# Altium PCB SCMLI_Snipped.PcbDoc (part 4 of 5)
Units mil, origin at the board's own origin, x right, y up, seen from the top; angles counter-clockwise.
Board outline 12129 x 3278 mil, 4 copper layers (Top Layer, GNDPlane, PowRet, Bottom Layer), stack 25.6 mil thick; 452 components, 391 nets, 1786 pads, 827 vias.
Unrouted connection lines stored in the file: 1.
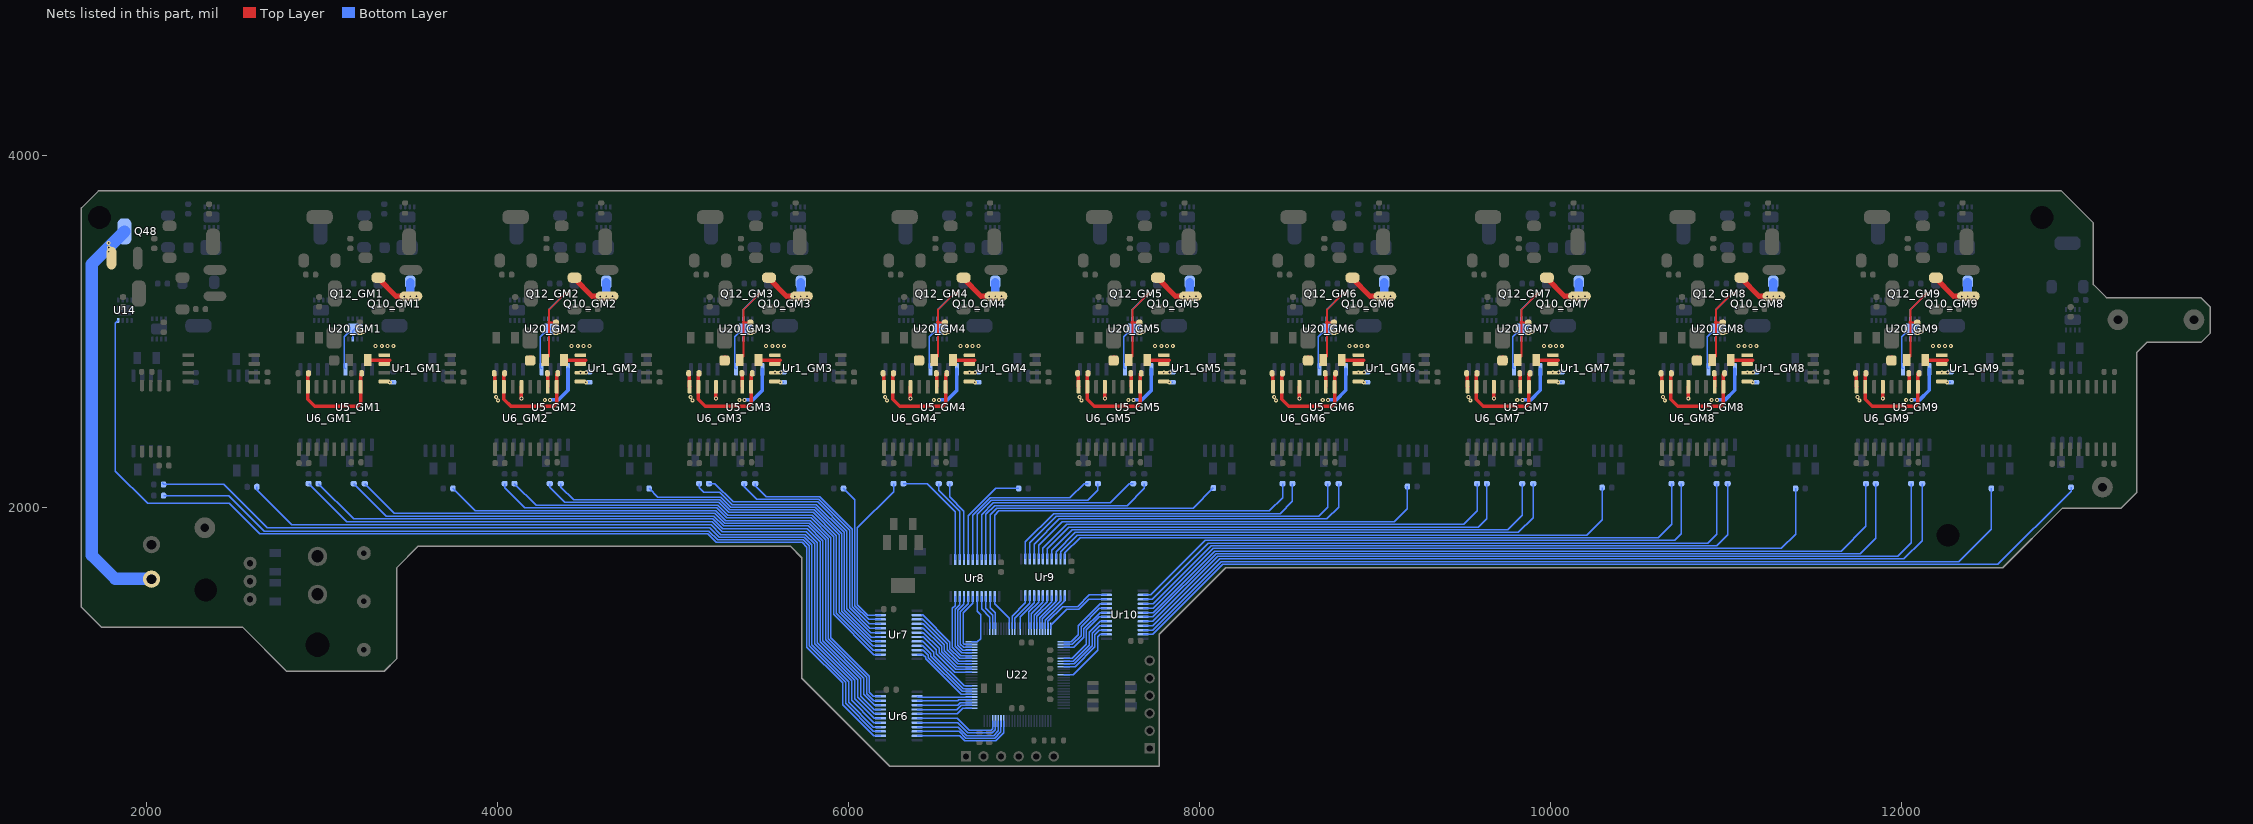
[diagram p6: the nets of this part, all layers, seen from the top]

## Via types
v1: diameter 23, hole 10, Top Layer to Bottom Layer, 827 vias

## Nets (pads, with @x,y where several pads share a name; then routed paths per layer and width w, separated by ;. In a path a pad name is that pad's centre, name@x,y a point inside that pad or via, vN(x,y) a via of type N, cw(c..) or ccw(c..) an arc to the next point about the centre after c; other vN are vias at no path point) (continued)
REFC_5V_GM2: C9_GM2.2 C17_GM2.2 Cr1_1_GM2.2 Cu5_2_GM2.2 Cu20_1_GM2.2 D6_GM2.1 U5_GM2.8 U6_GM2.10 U6_GM2.13 U6_GM2.16 U20_GM2.6 Ur1_GM2.3 | length 1131.9
  Top Layer w10: Cu5_2_GM2.2@4272.85,2837 4294,2858.15 4294,3052 4294,3125 4382,3213 v1(4395,3213) ; 4294.44,3051.56 Cu20_1_GM2.2@4333,3051.56
  Top Layer w20: C17_GM2.2@3985.4,2762 3985.4,2686.6 U6_GM2.16@3987,2685 ; v1(4137,2618.05) U6_GM2.13@4137,2685 ; C9_GM2.2@4284.47,2762 4287,2759.47 U6_GM2.10@4287,2685 ; 4294,3052 4294.44,3051.56
  Top Layer w50: D6_GM2.1@4186,2835 D6_GM2.1@4188,2837
  Bottom Layer w8: U20_GM2.6@4293.2,3073.07 4293.2,3124.2 4382,3213 v1(4395,3213)
  Bottom Layer w20: v1(4300,2610) 4346,2610 4402,2666 U5_GM2.8@4402,2784.13
  other v1: 4003,2608 4270,2610 3993,2627 4472.81,2765.28 4505,2766
REFC_5V_GM3: C9_GM3.2 C17_GM3.2 Cr1_1_GM3.2 Cu5_2_GM3.2 Cu20_1_GM3.2 D6_GM3.1 U5_GM3.8 U6_GM3.10 U6_GM3.13 U6_GM3.16 U20_GM3.6 Ur1_GM3.3 | length 1131.9
  Top Layer w10: Cu5_2_GM3.2@5380.85,2837 5402,2858.15 5402,3052 5402,3125 5490,3213 v1(5503,3213) ; 5402.44,3051.56 Cu20_1_GM3.2@5441,3051.56
  Top Layer w20: C17_GM3.2@5093.4,2762 5093.4,2686.6 U6_GM3.16@5095,2685 ; v1(5245,2618.05) U6_GM3.13@5245,2685 ; C9_GM3.2@5392.47,2762 5395,2759.47 U6_GM3.10@5395,2685 ; 5402,3052 5402.44,3051.56
  Top Layer w50: D6_GM3.1@5294,2835 D6_GM3.1@5296,2837
  Bottom Layer w8: U20_GM3.6@5401.2,3073.07 5401.2,3124.2 5490,3213 v1(5503,3213)
  Bottom Layer w20: v1(5408,2610) 5454,2610 5510,2666 U5_GM3.8@5510,2784.13
  other v1: 5111,2608 5378,2610 5101,2627 5580.81,2765.28 5613,2766
REFC_5V_GM4: C9_GM4.2 C17_GM4.2 Cr1_1_GM4.2 Cu5_2_GM4.2 Cu20_1_GM4.2 D6_GM4.1 U5_GM4.8 U6_GM4.10 U6_GM4.13 U6_GM4.16 U20_GM4.6 Ur1_GM4.3 | length 1131.9
  Top Layer w10: Cu5_2_GM4.2@6488.85,2837 6510,2858.15 6510,3052 6510,3125 6598,3213 v1(6611,3213) ; 6510.44,3051.56 Cu20_1_GM4.2@6549,3051.56
  Top Layer w20: C17_GM4.2@6201.4,2762 6201.4,2686.6 U6_GM4.16@6203,2685 ; v1(6353,2618.05) U6_GM4.13@6353,2685 ; C9_GM4.2@6500.47,2762 6503,2759.47 U6_GM4.10@6503,2685 ; 6510,3052 6510.44,3051.56
  Top Layer w50: D6_GM4.1@6402,2835 D6_GM4.1@6404,2837
  Bottom Layer w8: U20_GM4.6@6509.2,3073.07 6509.2,3124.2 6598,3213 v1(6611,3213)
  Bottom Layer w20: v1(6516,2610) 6562,2610 6618,2666 U5_GM4.8@6618,2784.13
  other v1: 6219,2608 6486,2610 6209,2627 6688.81,2765.28 6721,2766
REFC_5V_GM5: C9_GM5.2 C17_GM5.2 Cr1_1_GM5.2 Cu5_2_GM5.2 Cu20_1_GM5.2 D6_GM5.1 U5_GM5.8 U6_GM5.10 U6_GM5.13 U6_GM5.16 U20_GM5.6 Ur1_GM5.3 | length 1131.9
  Top Layer w10: Cu5_2_GM5.2@7596.85,2837 7618,2858.15 7618,3052 7618,3125 7706,3213 v1(7719,3213) ; 7618.44,3051.56 Cu20_1_GM5.2@7657,3051.56
  Top Layer w20: C17_GM5.2@7309.4,2762 7309.4,2686.6 U6_GM5.16@7311,2685 ; v1(7461,2618.05) U6_GM5.13@7461,2685 ; C9_GM5.2@7608.47,2762 7611,2759.47 U6_GM5.10@7611,2685 ; 7618,3052 7618.44,3051.56
  Top Layer w50: D6_GM5.1@7510,2835 D6_GM5.1@7512,2837
  Bottom Layer w8: U20_GM5.6@7617.2,3073.07 7617.2,3124.2 7706,3213 v1(7719,3213)
  Bottom Layer w20: v1(7624,2610) 7670,2610 7726,2666 U5_GM5.8@7726,2784.13
  other v1: 7327,2608 7594,2610 7317,2627 7796.81,2765.28 7829,2766
REFC_5V_GM6: C9_GM6.2 C17_GM6.2 Cr1_1_GM6.2 Cu5_2_GM6.2 Cu20_1_GM6.2 D6_GM6.1 U5_GM6.8 U6_GM6.10 U6_GM6.13 U6_GM6.16 U20_GM6.6 Ur1_GM6.3 | length 1131.9
  Top Layer w10: Cu5_2_GM6.2@8704.85,2837 8726,2858.15 8726,3052 8726,3125 8814,3213 v1(8827,3213) ; 8726.44,3051.56 Cu20_1_GM6.2@8765,3051.56
  Top Layer w20: C17_GM6.2@8417.4,2762 8417.4,2686.6 U6_GM6.16@8419,2685 ; v1(8569,2618.05) U6_GM6.13@8569,2685 ; C9_GM6.2@8716.47,2762 8719,2759.47 U6_GM6.10@8719,2685 ; 8726,3052 8726.44,3051.56
  Top Layer w50: D6_GM6.1@8618,2835 D6_GM6.1@8620,2837
  Bottom Layer w8: U20_GM6.6@8725.2,3073.07 8725.2,3124.2 8814,3213 v1(8827,3213)
  Bottom Layer w20: v1(8732,2610) 8778,2610 8834,2666 U5_GM6.8@8834,2784.13
  other v1: 8435,2608 8702,2610 8425,2627 8904.81,2765.28 8937,2766
REFC_5V_GM7: C9_GM7.2 C17_GM7.2 Cr1_1_GM7.2 Cu5_2_GM7.2 Cu20_1_GM7.2 D6_GM7.1 U5_GM7.8 U6_GM7.10 U6_GM7.13 U6_GM7.16 U20_GM7.6 Ur1_GM7.3 | length 1131.9
  Top Layer w10: Cu5_2_GM7.2@9812.85,2837 9834,2858.15 9834,3052 9834,3125 9922,3213 v1(9935,3213) ; 9834.44,3051.56 Cu20_1_GM7.2@9873,3051.56
  Top Layer w20: C17_GM7.2@9525.4,2762 9525.4,2686.6 U6_GM7.16@9527,2685 ; v1(9677,2618.05) U6_GM7.13@9677,2685 ; C9_GM7.2@9824.47,2762 9827,2759.47 U6_GM7.10@9827,2685 ; 9834,3052 9834.44,3051.56
  Top Layer w50: D6_GM7.1@9726,2835 D6_GM7.1@9728,2837
  Bottom Layer w8: U20_GM7.6@9833.2,3073.07 9833.2,3124.2 9922,3213 v1(9935,3213)
  Bottom Layer w20: v1(9840,2610) 9886,2610 9942,2666 U5_GM7.8@9942,2784.13
  other v1: 9543,2608 9810,2610 9533,2627 10012.81,2765.28 10045,2766
REFC_5V_GM8: C9_GM8.2 C17_GM8.2 Cr1_1_GM8.2 Cu5_2_GM8.2 Cu20_1_GM8.2 D6_GM8.1 U5_GM8.8 U6_GM8.10 U6_GM8.13 U6_GM8.16 U20_GM8.6 Ur1_GM8.3 | length 1131.9
  Top Layer w10: Cu5_2_GM8.2@10920.85,2837 10942,2858.15 10942,3052 10942,3125 11030,3213 v1(11043,3213) ; 10942.44,3051.56 Cu20_1_GM8.2@10981,3051.56
  Top Layer w20: C17_GM8.2@10633.4,2762 10633.4,2686.6 U6_GM8.16@10635,2685 ; v1(10785,2618.05) U6_GM8.13@10785,2685 ; C9_GM8.2@10932.47,2762 10935,2759.47 U6_GM8.10@10935,2685 ; 10942,3052 10942.44,3051.56
  Top Layer w50: D6_GM8.1@10834,2835 D6_GM8.1@10836,2837
  Bottom Layer w8: U20_GM8.6@10941.2,3073.07 10941.2,3124.2 11030,3213 v1(11043,3213)
  Bottom Layer w20: v1(10948,2610) 10994,2610 11050,2666 U5_GM8.8@11050,2784.13
  other v1: 10651,2608 10918,2610 10641,2627 11120.81,2765.28 11153,2766
REFC_5V_GM9: C9_GM9.2 C17_GM9.2 Cr1_1_GM9.2 Cu5_2_GM9.2 Cu20_1_GM9.2 D6_GM9.1 U5_GM9.8 U6_GM9.10 U6_GM9.13 U6_GM9.16 U20_GM9.6 Ur1_GM9.3 | length 1131.9
  Top Layer w10: Cu5_2_GM9.2@12028.85,2837 12050,2858.15 12050,3052 12050,3125 12138,3213 v1(12151,3213) ; 12050.44,3051.56 Cu20_1_GM9.2@12089,3051.56
  Top Layer w20: C17_GM9.2@11741.4,2762 11741.4,2686.6 U6_GM9.16@11743,2685 ; v1(11893,2618.05) U6_GM9.13@11893,2685 ; C9_GM9.2@12040.47,2762 12043,2759.47 U6_GM9.10@12043,2685 ; 12050,3052 12050.44,3051.56
  Top Layer w50: D6_GM9.1@11942,2835 D6_GM9.1@11944,2837
  Bottom Layer w8: U20_GM9.6@12049.2,3073.07 12049.2,3124.2 12138,3213 v1(12151,3213)
  Bottom Layer w20: v1(12056,2610) 12102,2610 12158,2666 U5_GM9.8@12158,2784.13
  other v1: 11759,2608 12026,2610 11749,2627 12228.81,2765.28 12261,2766
REFC_GM1: C8_GM1.1 C9_GM1.1 C17_GM1.1 Cr1_1_GM1.1 Cu5_2_GM1.1 Cu20_1_GM1.1 Q10_GM1.3 Q12_GM1.3 U5_GM1.5 U6_GM1.9 U6_GM1.15 U20_GM1.3 Ur1_GM1.1 Ur1_GM1.2 Ur1_GM1.4 | length 1362
  Top Layer w20: C17_GM1.1@2926.53,2762 2920,2755.47 U6_GM1.15@2920,2685 2920,2615 2960,2575 3203,2575 3220,2592 U6_GM1.9@3220,2685 3220,2755.47 C9_GM1.1@3226.53,2762 ; Cu5_2_GM1.1@3262.15,2837 3386.18,2837
  Top Layer w30: Q12_GM1.3@3322.29,3301.46 3422.62,3201.13 C8_GM1.1@3482.29,3201.13
  Bottom Layer w8: U5_GM1.5@3135,2787 3128,2794 3128,2971 U20_GM1.3@3153,2996 ; U20_GM1.3@3176.2,2956.93 3176.2,3002.2 U20_GM1.3@3189,3015 ; v1@3385,2709 v1(3386.47,2710.47) Cr1_1_GM1.1@3407,2710.47
  Bottom Layer w10: v1@3385,2709 cw(c3386.47,2709) v1(3386.47,2710.47)
  Bottom Layer w50: v1(3503,3201.2) Q10_GM1.3@3503,3281.02
  other v1: 3374,2917 3407,2917.28 3305,2917.56 3341,2918 3217,2992 3238,2996 3469,3200.17 3539,3201.2
REFC_GM2: C8_GM2.1 C9_GM2.1 C17_GM2.1 Cr1_1_GM2.1 Cu5_2_GM2.1 Cu20_1_GM2.1 Q10_GM2.3 Q12_GM2.3 U5_GM2.5 U6_GM2.9 U6_GM2.15 U20_GM2.3 Ur1_GM2.1 Ur1_GM2.2 Ur1_GM2.4 | length 1362
  Top Layer w20: C17_GM2.1@4043.53,2762 4037,2755.47 U6_GM2.15@4037,2685 4037,2615 4077,2575 4320,2575 4337,2592 U6_GM2.9@4337,2685 4337,2755.47 C9_GM2.1@4343.53,2762 ; Cu5_2_GM2.1@4379.15,2837 4503.18,2837
  Top Layer w30: Q12_GM2.3@4439.29,3301.46 4539.62,3201.13 C8_GM2.1@4599.29,3201.13
  Bottom Layer w8: U5_GM2.5@4252,2787 4245,2794 4245,2971 U20_GM2.3@4270,2996 ; U20_GM2.3@4293.2,2956.93 4293.2,3002.2 U20_GM2.3@4306,3015 ; v1@4502,2709 v1(4503.47,2710.47) Cr1_1_GM2.1@4524,2710.47
  Bottom Layer w10: v1@4502,2709 cw(c4503.47,2709) v1(4503.47,2710.47)
  Bottom Layer w50: v1(4620,3201.2) Q10_GM2.3@4620,3281.02
  other v1: 4491,2917 4524,2917.28 4422,2917.56 4458,2918 4334,2992 4355,2996 4586,3200.17 4656,3201.2
REFC_GM3: C8_GM3.1 C9_GM3.1 C17_GM3.1 Cr1_1_GM3.1 Cu5_2_GM3.1 Cu20_1_GM3.1 Q10_GM3.3 Q12_GM3.3 U5_GM3.5 U6_GM3.9 U6_GM3.15 U20_GM3.3 Ur1_GM3.1 Ur1_GM3.2 Ur1_GM3.4 | length 1362
  Top Layer w20: C17_GM3.1@5151.53,2762 5145,2755.47 U6_GM3.15@5145,2685 5145,2615 5185,2575 5428,2575 5445,2592 U6_GM3.9@5445,2685 5445,2755.47 C9_GM3.1@5451.53,2762 ; Cu5_2_GM3.1@5487.15,2837 5611.18,2837
  Top Layer w30: Q12_GM3.3@5547.29,3301.46 5647.62,3201.13 C8_GM3.1@5707.29,3201.13
  Bottom Layer w8: U5_GM3.5@5360,2787 5353,2794 5353,2971 U20_GM3.3@5378,2996 ; U20_GM3.3@5401.2,2956.93 5401.2,3002.2 U20_GM3.3@5414,3015 ; v1@5610,2709 v1(5611.47,2710.47) Cr1_1_GM3.1@5632,2710.47
  Bottom Layer w10: v1@5610,2709 cw(c5611.47,2709) v1(5611.47,2710.47)
  Bottom Layer w50: v1(5728,3201.2) Q10_GM3.3@5728,3281.02
  other v1: 5599,2917 5632,2917.28 5530,2917.56 5566,2918 5442,2992 5463,2996 5694,3200.17 5764,3201.2
REFC_GM4: C8_GM4.1 C9_GM4.1 C17_GM4.1 Cr1_1_GM4.1 Cu5_2_GM4.1 Cu20_1_GM4.1 Q10_GM4.3 Q12_GM4.3 U5_GM4.5 U6_GM4.9 U6_GM4.15 U20_GM4.3 Ur1_GM4.1 Ur1_GM4.2 Ur1_GM4.4 | length 1362
  Top Layer w20: C17_GM4.1@6259.53,2762 6253,2755.47 U6_GM4.15@6253,2685 6253,2615 6293,2575 6536,2575 6553,2592 U6_GM4.9@6553,2685 6553,2755.47 C9_GM4.1@6559.53,2762 ; Cu5_2_GM4.1@6595.15,2837 6719.18,2837
  Top Layer w30: Q12_GM4.3@6655.29,3301.46 6755.62,3201.13 C8_GM4.1@6815.29,3201.13
  Bottom Layer w8: U5_GM4.5@6468,2787 6461,2794 6461,2971 U20_GM4.3@6486,2996 ; U20_GM4.3@6509.2,2956.93 6509.2,3002.2 U20_GM4.3@6522,3015 ; v1@6718,2709 v1(6719.47,2710.47) Cr1_1_GM4.1@6740,2710.47
  Bottom Layer w10: v1@6718,2709 cw(c6719.47,2709) v1(6719.47,2710.47)
  Bottom Layer w50: v1(6836,3201.2) Q10_GM4.3@6836,3281.02
  other v1: 6707,2917 6740,2917.28 6638,2917.56 6674,2918 6550,2992 6571,2996 6802,3200.17 6872,3201.2
REFC_GM5: C8_GM5.1 C9_GM5.1 C17_GM5.1 Cr1_1_GM5.1 Cu5_2_GM5.1 Cu20_1_GM5.1 Q10_GM5.3 Q12_GM5.3 U5_GM5.5 U6_GM5.9 U6_GM5.15 U20_GM5.3 Ur1_GM5.1 Ur1_GM5.2 Ur1_GM5.4 | length 1362
  Top Layer w20: C17_GM5.1@7367.53,2762 7361,2755.47 U6_GM5.15@7361,2685 7361,2615 7401,2575 7644,2575 7661,2592 U6_GM5.9@7661,2685 7661,2755.47 C9_GM5.1@7667.53,2762 ; Cu5_2_GM5.1@7703.15,2837 7827.18,2837
  Top Layer w30: Q12_GM5.3@7763.29,3301.46 7863.62,3201.13 C8_GM5.1@7923.29,3201.13
  Bottom Layer w8: U5_GM5.5@7576,2787 7569,2794 7569,2971 U20_GM5.3@7594,2996 ; U20_GM5.3@7617.2,2956.93 7617.2,3002.2 U20_GM5.3@7630,3015 ; v1@7826,2709 v1(7827.47,2710.47) Cr1_1_GM5.1@7848,2710.47
  Bottom Layer w10: v1@7826,2709 cw(c7827.47,2709) v1(7827.47,2710.47)
  Bottom Layer w50: v1(7944,3201.2) Q10_GM5.3@7944,3281.02
  other v1: 7815,2917 7848,2917.28 7746,2917.56 7782,2918 7658,2992 7679,2996 7910,3200.17 7980,3201.2
REFC_GM6: C8_GM6.1 C9_GM6.1 C17_GM6.1 Cr1_1_GM6.1 Cu5_2_GM6.1 Cu20_1_GM6.1 Q10_GM6.3 Q12_GM6.3 U5_GM6.5 U6_GM6.9 U6_GM6.15 U20_GM6.3 Ur1_GM6.1 Ur1_GM6.2 Ur1_GM6.4 | length 1362
  Top Layer w20: C17_GM6.1@8475.53,2762 8469,2755.47 U6_GM6.15@8469,2685 8469,2615 8509,2575 8752,2575 8769,2592 U6_GM6.9@8769,2685 8769,2755.47 C9_GM6.1@8775.53,2762 ; Cu5_2_GM6.1@8811.15,2837 8935.18,2837
  Top Layer w30: Q12_GM6.3@8871.29,3301.46 8971.62,3201.13 C8_GM6.1@9031.29,3201.13
  Bottom Layer w8: U5_GM6.5@8684,2787 8677,2794 8677,2971 U20_GM6.3@8702,2996 ; U20_GM6.3@8725.2,2956.93 8725.2,3002.2 U20_GM6.3@8738,3015 ; v1@8934,2709 v1(8935.47,2710.47) Cr1_1_GM6.1@8956,2710.47
  Bottom Layer w10: v1@8934,2709 cw(c8935.47,2709) v1(8935.47,2710.47)
  Bottom Layer w50: v1(9052,3201.2) Q10_GM6.3@9052,3281.02
  other v1: 8923,2917 8956,2917.28 8854,2917.56 8890,2918 8766,2992 8787,2996 9018,3200.17 9088,3201.2
REFC_GM7: C8_GM7.1 C9_GM7.1 C17_GM7.1 Cr1_1_GM7.1 Cu5_2_GM7.1 Cu20_1_GM7.1 Q10_GM7.3 Q12_GM7.3 U5_GM7.5 U6_GM7.9 U6_GM7.15 U20_GM7.3 Ur1_GM7.1 Ur1_GM7.2 Ur1_GM7.4 | length 1362
  Top Layer w20: C17_GM7.1@9583.53,2762 9577,2755.47 U6_GM7.15@9577,2685 9577,2615 9617,2575 9860,2575 9877,2592 U6_GM7.9@9877,2685 9877,2755.47 C9_GM7.1@9883.53,2762 ; Cu5_2_GM7.1@9919.15,2837 10043.18,2837
  Top Layer w30: Q12_GM7.3@9979.29,3301.46 10079.62,3201.13 C8_GM7.1@10139.29,3201.13
  Bottom Layer w8: U5_GM7.5@9792,2787 9785,2794 9785,2971 U20_GM7.3@9810,2996 ; U20_GM7.3@9833.2,2956.93 9833.2,3002.2 U20_GM7.3@9846,3015 ; v1@10042,2709 v1(10043.47,2710.47) Cr1_1_GM7.1@10064,2710.47
  Bottom Layer w10: v1@10042,2709 cw(c10043.47,2709) v1(10043.47,2710.47)
  Bottom Layer w50: v1(10160,3201.2) Q10_GM7.3@10160,3281.02
  other v1: 10031,2917 10064,2917.28 9962,2917.56 9998,2918 9874,2992 9895,2996 10126,3200.17 10196,3201.2
REFC_GM8: C8_GM8.1 C9_GM8.1 C17_GM8.1 Cr1_1_GM8.1 Cu5_2_GM8.1 Cu20_1_GM8.1 Q10_GM8.3 Q12_GM8.3 U5_GM8.5 U6_GM8.9 U6_GM8.15 U20_GM8.3 Ur1_GM8.1 Ur1_GM8.2 Ur1_GM8.4 | length 1362
  Top Layer w20: C17_GM8.1@10691.53,2762 10685,2755.47 U6_GM8.15@10685,2685 10685,2615 10725,2575 10968,2575 10985,2592 U6_GM8.9@10985,2685 10985,2755.47 C9_GM8.1@10991.53,2762 ; Cu5_2_GM8.1@11027.15,2837 11151.18,2837
  Top Layer w30: Q12_GM8.3@11087.29,3301.46 11187.62,3201.13 C8_GM8.1@11247.29,3201.13
  Bottom Layer w8: U5_GM8.5@10900,2787 10893,2794 10893,2971 U20_GM8.3@10918,2996 ; U20_GM8.3@10941.2,2956.93 10941.2,3002.2 U20_GM8.3@10954,3015 ; v1@11150,2709 v1(11151.47,2710.47) Cr1_1_GM8.1@11172,2710.47
  Bottom Layer w10: v1@11150,2709 cw(c11151.47,2709) v1(11151.47,2710.47)
  Bottom Layer w50: v1(11268,3201.2) Q10_GM8.3@11268,3281.02
  other v1: 11139,2917 11172,2917.28 11070,2917.56 11106,2918 10982,2992 11003,2996 11234,3200.17 11304,3201.2
REFC_GM9: C8_GM9.1 C9_GM9.1 C17_GM9.1 Cr1_1_GM9.1 Cu5_2_GM9.1 Cu20_1_GM9.1 Q10_GM9.3 Q12_GM9.3 U5_GM9.5 U6_GM9.9 U6_GM9.15 U20_GM9.3 Ur1_GM9.1 Ur1_GM9.2 Ur1_GM9.4 | length 1362
  Top Layer w20: C17_GM9.1@11799.53,2762 11793,2755.47 U6_GM9.15@11793,2685 11793,2615 11833,2575 12076,2575 12093,2592 U6_GM9.9@12093,2685 12093,2755.47 C9_GM9.1@12099.53,2762 ; Cu5_2_GM9.1@12135.15,2837 12259.18,2837
  Top Layer w30: Q12_GM9.3@12195.29,3301.46 12295.62,3201.13 C8_GM9.1@12355.29,3201.13
  Bottom Layer w8: U5_GM9.5@12008,2787 12001,2794 12001,2971 U20_GM9.3@12026,2996 ; U20_GM9.3@12049.2,2956.93 12049.2,3002.2 U20_GM9.3@12062,3015 ; v1@12258,2709 v1(12259.47,2710.47) Cr1_1_GM9.1@12280,2710.47
  Bottom Layer w10: v1@12258,2709 cw(c12259.47,2709) v1(12259.47,2710.47)
  Bottom Layer w50: v1(12376,3201.2) Q10_GM9.3@12376,3281.02
  other v1: 12247,2917 12280,2917.28 12178,2917.56 12214,2918 12090,2992 12111,2996 12342,3200.17 12412,3201.2
SW_A1: Rr4.2 Ur6.17 | length 4519.1
  Bottom Layer w8: Rr4.2@2629.56,2115 2629.56,2097.44 2829,1898 5218,1898 5273,1843 5754.79,1843 5807,1790.79 5807,1220.72 6018,1009.72 6018,898 6144.5,771.5 Ur6.17@6182.5,771.5
SW_A1_uC: U22.71 Ur6.8 | length 528.3
  Bottom Layer w8: Ur6.8@6391.5,771.5 6622.29,771.5 6680.79,713 6820.36,713 6837.4,730.04 U22.71@6837.4,781.16
SW_A2: R16_GM1.2 Ur6.22 | length 3325.4
  Bottom Layer w8: R16_GM1.2@3746.56,2106 3873.56,1979 5244.51,1979 5300.51,1923 5781.08,1923 5885,1819.08 5885,1248.79 6104,1029.79 6104,937 6144.5,896.5 Ur6.22@6182.5,896.5
SW_A2_uC: U22.79 Ur6.3 | length 311.6
  Bottom Layer w8: Ur6.3@6391.5,896.5 6622.5,896.5 6627.93,901.93 U22.79@6700.88,901.93
SW_A3: R16_GM2.2 Ur7.17 | length 1939
  Bottom Layer w8: R16_GM2.2@4863.56,2106 4913.56,2056 5273.57,2056 5330.57,1999 5811.15,1999 5961,1849.15 5961,1406.93 6133.43,1234.5 Ur7.17@6182.5,1234.5
SW_A3_uC: U22.84 Ur7.8 | length 403.4
  Bottom Layer w8: Ur7.8@6414,1235 6424,1235 6486,1173 6486,1154 6659.33,980.67 U22.84@6700.88,980.67
SW_A4: R16_GM3.2 Ur7.22 | length 873.7
  Bottom Layer w8: R16_GM3.2@5971.56,2106 6036,2041.56 6036,1438 6114.5,1359.5 Ur7.22@6182.5,1359.5
SW_A4_uC: U22.93 Ur7.3 | length 404.8
  Bottom Layer w8: Ur7.3@6414,1360 6423,1360 6561.59,1221.41 6561.59,1188.19 6627.39,1122.4 U22.93@6700.88,1122.4
SW_A5: R16_GM4.2 Ur8.17 | length 601.6
  Bottom Layer w8: Ur8.17@6683,1700 6683,1951 6838,2106 R16_GM4.2@6969.44,2106
SW_A5_uC: U22.98 Ur8.8 | length 362.1
  Bottom Layer w8: Ur8.8@6683,1491 6683,1449 6637,1403 6637,1219.43 6655.29,1201.14 U22.98@6700.88,1201.14
SW_A6: R16_GM5.2 Ur8.22 | length 1590.2
  Bottom Layer w8: Ur8.22@6808,1700 6808,1955 6846,1993 7963.44,1993 R16_GM5.2@8079.44,2109
SW_A6_uC: U22.5 Ur8.3 | length 197
  Bottom Layer w8: Ur8.3@6808,1491 6808,1427 6837.4,1397.6 U22.5@6837.4,1306.16
SW_A7: R16_GM6.2 Ur9.17 | length 2391.2
  Bottom Layer w8: Ur9.17@7083,1704 7083,1781 7219,1917 9110,1917 9184.44,1991.44 R16_GM6.2@9184.44,2117
SW_A7_uC: U22.17 Ur9.8 | length 212.3
  Bottom Layer w8: U22.17@7026.38,1306.16 7026.38,1402.16 7083,1458.79 Ur9.8@7083,1495
SW_A8: R16_GM7.2 Ur9.22 | length 3384.4
  Bottom Layer w8: Ur9.22@7208,1704 7208,1744 7304,1840 10205,1840 10293.44,1928.44 R16_GM7.2@10293.44,2111
SW_A8_uC: U22.22 Ur9.3 | length 231.5
  Bottom Layer w8: U22.22@7105.12,1306.16 7105.12,1363.12 7208,1466 Ur9.3@7208,1495
SW_A9: R16_GM8.2 Ur10.17 | length 4151.6
  Bottom Layer w8: Ur10.17@7679,1424 7736,1424 8077,1765 11315,1765 11395.44,1845.44 R16_GM8.2@11395.44,2106
SW_A9_uC: U22.27 Ur10.8 | length 360.4
  Bottom Layer w8: U22.27@7225.88,1216.89 7274.89,1216.89 7325,1267 7325,1319 7430,1424 Ur10.8@7470,1424
SW_A10: R16_GM9.2 Ur10.22 | length 5302.4
  Bottom Layer w8: Ur10.22@7679,1299 7734,1299 8124,1689 12326,1689 12511.44,1874.44 R16_GM9.2@12511.44,2106
SW_A10_uC: U22.35 Ur10.3 | length 371
  Bottom Layer w8: U22.35@7225.88,1090.9 7291.33,1090.9 7404,1203.57 7404,1273 7430,1299 Ur10.3@7470,1299
SW_B2: R17_GM1.2 Ur6.19 | length 4139.8
  Bottom Layer w8: R17_GM1.2@2980,2133.44 3181.44,1932 5227.87,1932 5283.87,1876 5764.44,1876 5838,1802.44 5838,1232.15 6053,1017.15 6053,915 6146.5,821.5 Ur6.19@6182.5,821.5
SW_B2_uC: U22.76 Ur6.6 | length 323.1
  Bottom Layer w8: Ur6.6@6391.5,821.5 6618.5,821.5 6651.68,854.68 U22.76@6700.88,854.68
SW_B3: R17_GM2.2 Ur7.14 | length 2748
  Bottom Layer w8: R17_GM2.2@4097,2133.44 4220.44,2010 5255.93,2010 5312.93,1953 5793.51,1953 5916,1830.51 5916,1388.29 6144.79,1159.5 Ur7.14@6182.5,1159.5
SW_B3_uC: U22.81 Ur7.11 | length 407.5
  Bottom Layer w8: Ur7.11@6391.5,1159.5 6424.5,1159.5 6440,1144 6440,1136.36 6642.19,934.17 6649.83,934.17 6650.58,933.42 U22.81@6700.88,933.42
SW_B4: R17_GM3.2 Ur7.19 | length 1588.2
  Bottom Layer w8: R17_GM3.2@5205,2133.44 5238.56,2133.44 5343,2029 5823.57,2029 5991,1861.57 5991,1419.36 6125.86,1284.5 Ur7.19@6182.5,1284.5
SW_B4_uC: U22.90 Ur7.6 | length 388.4
  Bottom Layer w8: Ur7.6@6414,1285 6426,1285 6516,1195 6516,1170.15 6610.99,1075.15 U22.90@6700.88,1075.15
SW_B5: R17_GM4.2 Ur8.14 | length 634.8
  Bottom Layer w8: R17_GM4.2@6313,2133.44 6448.09,2133.44 6608,1973.53 Ur8.14@6608,1700
SW_B5_uC: U22.95 Ur8.11 | length 425.1
  Bottom Layer w8: Ur8.11@6608,1491 6608,1439 6592,1423 6592,1200.79 6638.89,1153.89 U22.95@6700.88,1153.89
SW_B6: R17_GM5.2 Ur8.19 | length 1039.9
  Bottom Layer w8: Ur8.19@6733,1700 6733,1957.79 6813.21,2038 7362,2038 7421,2097 R17_GM5.2@7421,2133.44
SW_B6_uC: U22.100 Ur8.6 | length 308
  Bottom Layer w8: U22.100@6700.88,1232.63 6734.63,1232.63 6753,1251 6753,1387 6733,1407 Ur8.6@6733,1491
SW_B7: R17_GM6.2 Ur9.14 | length 1815.7
  Bottom Layer w8: Ur9.14@7008,1704 7008,1802 7169,1963 8460,1963 8529,2032 R17_GM6.2@8529,2133.44
SW_B7_uC: U22.11 Ur9.11 | length 220.4
  Bottom Layer w8: U22.11@6931.89,1306.16 6931.89,1378.89 7008,1455 Ur9.11@7008,1495
SW_B8: R17_GM7.2 Ur9.19 | length 2833.3
  Bottom Layer w8: Ur9.19@7133,1704 7133,1763 7255,1885 9588,1885 9637,1934 R17_GM7.2@9637,2133.44
SW_B8_uC: U22.19 Ur9.6 | length 220
  Bottom Layer w8: U22.19@7057.87,1306.16 7057.87,1383.87 7133,1459 Ur9.6@7133,1495
SW_B9: R17_GM8.2 Ur10.14 | length 3496
  Bottom Layer w8: Ur10.14@7679,1499 7722,1499 8033,1810 10707,1810 10745,1848 R17_GM8.2@10745,2133.44
SW_B9_uC: U22.24 Ur10.11 | length 438
  Bottom Layer w8: U22.24@7136.61,1306.16 7136.61,1348.4 7221.21,1433 7307,1433 7373,1499 Ur10.11@7470,1499
SW_B10: R17_GM9.2 Ur10.19 | length 4670.4
  Bottom Layer w8: Ur10.19@7679,1374 7734,1374 8094,1734 11764,1734 11853,1823 R17_GM9.2@11853,2133.44
SW_B10_uC: U22.32 Ur10.6 | length 389.1
  Bottom Layer w8: U22.32@7225.88,1138.15 7274.93,1138.15 7356,1219.21 7356,1300 7430,1374 Ur10.6@7470,1374
SW_B11: R98.2 Ur10.23 | length 5646.4
  Bottom Layer w8: Ur10.23@7679,1274 7733,1274 8133,1674 12549,1674 12965,2090 R98.2@12965,2112.44
SW_B11_uC: U22.38 Ur10.2 | length 384.6
  Bottom Layer w8: U22.38@7225.88,1043.66 7280.66,1043.66 7421,1184 7421,1261 7434,1274 Ur10.2@7470,1274
SW_C1: U14.4 Ur6.14 | length 6254.3
  Bottom Layer w8: U14.4@1839.14,3063.07 1824,3047.93 1824,2205 2008,2021 2473,2021 2647,1847 5199,1847 5248,1798 5736.15,1798 5762,1772.15 5762,1202.08 5966,998.08 5966,874 6143.5,696.5 Ur6.14@6182.5,696.5
SW_C1_uC: U22.68 Ur6.11 | length 591.4
  Bottom Layer w8: Ur6.11@6391.5,696.5 6632.69,696.5 6661.19,668 6839,668 6884.64,713.64 U22.68@6884.64,781.16
SW_C2: R18_GM1.1 Ur6.18 | length 4208.5
  Bottom Layer w8: R18_GM1.1@2924,2133.44 3142.44,1915 5223.65,1915 5279.65,1859 5760,1859 5822,1797 5822,1226.93 6035,1013.93 6035,907.55 6146.05,796.5 Ur6.18@6182.5,796.5
SW_C2_uC: U22.72 Ur6.7 | length 507.3
  Bottom Layer w8: Ur6.7@6391.5,796.5 6618.5,796.5 6687,728 6814.15,728 6821.65,735.51 U22.72@6821.65,781.16
SW_C3: R18_GM2.1 Ur6.23 | length 3044
  Bottom Layer w8: R18_GM2.1@4041,2133.44 4041,2111 4157,1995 5249.72,1995 5306.72,1938 5787.29,1938 5900,1825.29 5900,1255 6119,1036 6119,945 6142.5,921.5 Ur6.23@6182.5,921.5
SW_C3_uC: U22.80 Ur6.2 | length 311
  Bottom Layer w8: Ur6.2@6391.5,921.5 6395.33,917.67 U22.80@6700.88,917.67
SW_C4: R18_GM3.1 Ur7.18 | length 1668.3
  Bottom Layer w8: R18_GM3.1@5149,2133.44 5149,2110 5174,2085 5265.79,2085 5336.79,2014 5817.36,2014 5976,1855.36 5976,1413.15 6129.65,1259.5 Ur7.18@6182.5,1259.5
SW_C4_uC: U22.89 Ur7.7 | length 382.9
  Bottom Layer w8: Ur7.7@6414,1260 6427,1260 6501,1186 6501,1163.93 6605.53,1059.41 U22.89@6700.88,1059.41
SW_C5: R18_GM4.1 Ur7.23 | length 930.8
  Bottom Layer w8: Ur7.23@6182.5,1384.5 6110.71,1384.5 6051,1444.21 6051,1881 6257,2087 R18_GM4.1@6257,2133.44
SW_C5_uC: U22.94 Ur7.2 | length 410.2
  Bottom Layer w8: Ur7.2@6414,1385 6422,1385 6577,1230 6577,1194 6632.85,1138.15 U22.94@6700.88,1138.15
SW_C6: R18_GM5.1 Ur8.18 | length 985.3
  Bottom Layer w8: Ur8.18@6708,1700 6708,1954 6807,2053 7262,2053 7342.44,2133.44 R18_GM5.1@7365,2133.44
SW_C6_uC: U22.99 Ur8.7 | length 340.2
  Bottom Layer w8: U22.99@6700.88,1216.89 6660.75,1216.89 6653,1224.64 6653,1397.79 6708,1452.79 Ur8.7@6708,1491
SW_C7: R18_GM6.1 Ur8.23 | length 2015.4
  Bottom Layer w8: Ur8.23@6833,1700 6833,1954 6857,1978 8398,1978 8473,2053 R18_GM6.1@8473,2133.44
SW_C7_uC: U22.10 Ur8.2 | length 219.3
  Bottom Layer w8: Ur8.2@6833,1491 6833,1448.8 6916.14,1365.65 U22.10@6916.14,1306.16
SW_C8: R18_GM7.1 Ur9.18 | length 2777.4
  Bottom Layer w8: Ur9.18@7108,1704 7108,1764.5 7244.5,1901 9504,1901 9581,1978 R18_GM7.1@9581,2133.44
SW_C8_uC: U22.18 Ur9.7 | length 216.1
  Bottom Layer w8: U22.18@7042.12,1306.16 7042.12,1391.98 7108,1457.85 Ur9.7@7108,1495
SW_C9: R18_GM8.1 Ur9.23 | length 3790
  Bottom Layer w8: Ur9.23@7233,1704 7233,1739 7319,1825 10612,1825 10689,1902 R18_GM8.1@10689,2133.44
SW_C9_uC: U22.23 Ur9.2 | length 235.3
  Bottom Layer w8: U22.23@7120.87,1306.16 7120.87,1353.87 7233,1466 Ur9.2@7233,1495
SW_C10: R18_GM9.1 Ur10.18 | length 4564.8
  Bottom Layer w8: Ur10.18@7679,1399 7737,1399 8087,1749 11656,1749 11797,1890 R18_GM9.1@11797,2133.44
SW_C10_uC: U22.28 Ur10.7 | length 353.6
  Bottom Layer w8: U22.28@7225.88,1201.14 7282.14,1201.14 7340,1259 7340,1306 7433,1399 Ur10.7@7470,1399
SW_D1: R2.2 Ur6.16 | length 5070.7
  Bottom Layer w8: R2.2@2090.5,2136.94 2098.5,2128.94 2441.06,2128.94 2689,1881 5211,1881 5264,1828 5748.57,1828 5792,1784.57 5792,1214.51 6001,1005.51 6001,888 6142.5,746.5 Ur6.16@6182.5,746.5
SW_D1_uC: U22.70 Ur6.9 | length 549.3
  Bottom Layer w8: Ur6.9@6391.5,746.5 6626.07,746.5 6674.57,698 6826.57,698 6853.15,724.58 U22.70@6853.15,781.16
SW_D2: R19_GM1.2 Ur6.21 | length 3849.6
  Bottom Layer w8: R19_GM1.2@3244,2133.44 3413.44,1964 5238.29,1964 5295.29,1907 5775.87,1907 5870,1812.87 5870,1242.57 6087,1025.57 6087,932.79 6148.29,871.5 Ur6.21@6182.5,871.5
SW_D2_uC: U22.78 Ur6.4 | length 315.5
  Bottom Layer w8: Ur6.4@6391.5,871.5 6621.29,871.5 6635.96,886.18 U22.78@6700.88,886.18
SW_D3: R19_GM2.2 Ur7.16 | length 2474.6
  Bottom Layer w8: R19_GM2.2@4361,2133.44 4361,2114 4434,2041 5267.36,2041 5324.36,1984 5804.93,1984 5946,1842.93 5946,1400.72 6137.22,1209.5 Ur7.16@6182.5,1209.5
SW_D3_uC: U22.83 Ur7.9 | length 396.7
  Bottom Layer w8: Ur7.9@6414,1210 6423,1210 6470,1163 6470,1148.79 6653.87,964.92 U22.83@6700.88,964.92
SW_D4: R19_GM3.2 Ur7.21 | length 1310.2
  Bottom Layer w8: R19_GM3.2@5469,2133.44 5469,2122 5532,2059 5836,2059 6021,1874 6021,1431.79 6118.29,1334.5 Ur7.21@6182.5,1334.5
SW_D4_uC: U22.92 Ur7.4 | length 399.9
  Bottom Layer w8: Ur7.4@6414,1335 6425,1335 6546,1214 6546,1182.57 6621.92,1106.65 U22.92@6700.88,1106.65
SW_D5: R19_GM4.2 Ur8.16 | length 467
  Bottom Layer w8: R19_GM4.2@6577,2133.44 6577,2058 6658,1977 Ur8.16@6658,1700
SW_D5_uC: U22.97 Ur8.9 | length 383.1
  Bottom Layer w8: Ur8.9@6658,1491 6658,1446.57 6622,1410.57 6622,1213.21 6649.82,1185.39 U22.97@6700.88,1185.39
SW_D6: R19_GM5.2 Ur8.21 | length 1249.3
  Bottom Layer w8: Ur8.21@6783,1700 6783,1959 6832,2008 7587,2008 7685,2106 R19_GM5.2@7685,2133.44
SW_D6_uC: U22.4 Ur8.4 | length 200.9
  Bottom Layer w8: Ur8.4@6783,1491 6783,1423 6821.65,1384.35 U22.4@6821.65,1306.16
SW_D7: R19_GM6.2 Ur9.16 | length 2040.3
  Bottom Layer w8: Ur9.16@7058,1704 7058,1788 7202,1932 8725,1932 8793,2000 R19_GM6.2@8793,2133.44
SW_D7_uC: U22.14 Ur9.9 | length 221.5
  Bottom Layer w8: U22.14@6979.13,1306.16 6979.13,1376.13 7058,1455 Ur9.9@7058,1495
SW_D8: R19_GM7.2 Ur9.21 | length 3033.8
  Bottom Layer w8: Ur9.21@7183,1704 7183,1746 7292,1855 9816,1855 9901,1940 R19_GM7.2@9901,2133.44
SW_D8_uC: U22.21 Ur9.4 | length 227.6
  Bottom Layer w8: U22.21@7089.37,1306.16 7089.37,1369.5 7183,1463.13 Ur9.4@7183,1495
SW_D9: R19_GM8.2 Ur10.16 | length 3784.5
  Bottom Layer w8: Ur10.16@7679,1449 7737,1449 8068,1780 10947.39,1780 11009,1841.61 R19_GM8.2@11009,2133.44
SW_D9_uC: U22.26 Ur10.9 | length 364.2
  Bottom Layer w8: U22.26@7225.88,1232.63 7268.57,1232.63 7309,1273.06 7309,1325 7433,1449 Ur10.9@7470,1449
SW_D10: R19_GM9.2 Ur10.21 | length 4963.9
  Bottom Layer w8: Ur10.21@7679,1324 7734,1324 8114,1704 12013,1704 12117,1808 R19_GM9.2@12117,2133.44
SW_D10_uC: U22.34 Ur10.4 | length 376.4
  Bottom Layer w8: U22.34@7225.88,1106.65 7285.86,1106.65 7388,1208.79 7388,1281 7431,1324 Ur10.4@7470,1324
SW_E1: R4.2 Ur6.15 | length 5046
  Bottom Layer w8: R4.2@2098,2065 2469,2065 2671,1863 5205,1863 5255,1813 5742.36,1813 5777,1778.36 5777,1208.29 5983,1002.29 5983,881 6142.5,721.5 Ur6.15@6182.5,721.5
SW_E1_uC: U22.69 Ur6.10 | length 570.3
  Bottom Layer w8: Ur6.10@6391.5,721.5 6629.86,721.5 6668.36,683 6832.79,683 6868.9,719.11 U22.69@6868.9,781.16
SW_E2: R20_GM1.2 Ur6.20 | length 3926.8
  Bottom Layer w8: R20_GM1.2@3181,2133.44 3366.44,1948 5233.08,1948 5289.08,1892 5769.65,1892 5853,1808.65 5853,1238.36 6070,1021.36 6070,922 6145.5,846.5 Ur6.20@6182.5,846.5
SW_E2_uC: U22.77 Ur6.5 | length 319.3
  Bottom Layer w8: Ur6.5@6391.5,846.5 6617.5,846.5 6641.43,870.43 U22.77@6700.88,870.43
SW_E3: R20_GM2.2 Ur7.15 | length 2549.2
  Bottom Layer w8: R20_GM2.2@4298,2133.44 4298,2112 4384,2026 5261.15,2026 5318.15,1969 5798.72,1969 5931,1836.72 5931,1394.51 6141.01,1184.5 Ur7.15@6182.5,1184.5
SW_E3_uC: U22.82 Ur7.10 | length 392.4
  Bottom Layer w8: Ur7.10@6414,1185 6426,1185 6455,1156 6455,1142.57 6648.4,949.17 U22.82@6700.88,949.17
SW_E4: R20_GM3.2 Ur7.20 | length 1387
  Bottom Layer w8: R20_GM3.2@5406,2133.44 5406,2116 5478,2044 5829.79,2044 6006,1867.79 6006,1425.57 6122.07,1309.5 Ur7.20@6182.5,1309.5
SW_E4_uC: U22.91 Ur7.5 | length 395
  Bottom Layer w8: Ur7.5@6414,1310 6427,1310 6531,1206 6531,1176.36 6616.46,1090.9 U22.91@6700.88,1090.9
SW_E5: R20_GM4.2 Ur8.15 | length 482.7
  Bottom Layer w8: R20_GM4.2@6514,2133.44 6514,2096 6633,1977 Ur8.15@6633,1700
SW_E5_uC: U22.96 Ur8.10 | length 404.1
  Bottom Layer w8: Ur8.10@6633,1491 6633,1442.79 6607,1416.79 6607,1207 6644.36,1169.64 U22.96@6700.88,1169.64
SW_E6: R20_GM5.2 Ur8.20 | length 1194.1
  Bottom Layer w8: Ur8.20@6758,1700 6758,1957 6824,2023 7490,2023 7600.44,2133.44 R20_GM5.2@7622,2133.44
SW_E6_uC: U22.3 Ur8.5 | length 204.7
  Bottom Layer w8: Ur8.5@6758,1491 6758,1421 6805.9,1373.1 U22.3@6805.9,1306.16
SW_E7: R20_GM6.2 Ur9.15 | length 2007.5
  Bottom Layer w8: Ur9.15@7033,1704 7033,1796 7184,1947 8678,1947 8730,1999 R20_GM6.2@8730,2133.44
SW_E7_uC: U22.12 Ur9.10 | length 224.2
  Bottom Layer w8: U22.12@6947.64,1306.16 6947.64,1367.64 7033,1453 Ur9.10@7033,1495
SW_E8: R20_GM7.2 Ur9.20 | length 2992.3
  Bottom Layer w8: Ur9.20@7158,1704 7158,1753 7275,1870 9755,1870 9838,1953 R20_GM7.2@9838,2133.44
SW_E8_uC: U22.20 Ur9.5 | length 223.8
  Bottom Layer w8: U22.20@7073.62,1306.16 7073.62,1377.19 7158,1461.57 Ur9.5@7158,1495
SW_E9: R20_GM8.2 Ur10.15 | length 3709.2
  Bottom Layer w8: Ur10.15@7679,1474 7730,1474 8051,1795 10896.2,1795 10946,1844.8 R20_GM8.2@10946,2133.44
SW_E9_uC: U22.25 Ur10.10 | length 399.5
  Bottom Layer w8: U22.25@7152.36,1306.16 7152.36,1327.25 7242.11,1417 7313,1417 7370,1474 Ur10.10@7470,1474
SW_E10: R20_GM9.2 Ur10.20 | length 4897.6
  Bottom Layer w8: Ur10.20@7679,1349 7733,1349 8103,1719 11977,1719 12054,1796 R20_GM9.2@12054,2133.44
SW_E10_uC: U22.33 Ur10.5 | length 381.3
  Bottom Layer w8: U22.33@7225.88,1122.4 7280.4,1122.4 7371,1213 7371,1287 7433,1349 Ur10.5@7470,1349
V_IN: Cin.2 J1.2 Q48.2 | length 2317.5
  Bottom Layer w70: Q48.2@1875.19,3569.88 1689,3383.69 1689,1725 1823,1591 J1.2@2029,1591
  other v1: 1786,3455 1786,3479 1785,3504
pads on no net: J6.0 P1.1 P2.2 P2.6 U1.1 U1.4 U1.5 U2_GM1.1 U2_GM1.4 U2_GM1.5 U2_GM2.1 U2_GM2.4 U2_GM2.5 U2_GM3.1 U2_GM3.4 U2_GM3.5 U2_GM4.1 U2_GM4.4 U2_GM4.5 U2_GM5.1 U2_GM5.4 U2_GM5.5 U2_GM6.1 U2_GM6.4 U2_GM6.5 U2_GM7.1 U2_GM7.4 U2_GM7.5 U2_GM8.1 U2_GM8.4 U2_GM8.5 U2_GM9.1 U2_GM9.4 U2_GM9.5 U3_GM1.3 U3_GM1.6 U3_GM2.3 U3_GM2.6 U3_GM3.3 U3_GM3.6 U3_GM4.3 U3_GM4.6 U3_GM5.3 U3_GM5.6 U3_GM6.3 U3_GM6.6 U3_GM7.3 U3_GM7.6 U3_GM8.3 U3_GM8.6 U3_GM9.3 U3_GM9.6 U6_GM1.3 U6_GM1.5 U6_GM1.11 U6_GM1.12 U6_GM1.14 U6_GM2.3 U6_GM2.5 U6_GM2.11 U6_GM2.12 U6_GM2.14 U6_GM3.3 U6_GM3.5 U6_GM3.11 U6_GM3.12 U6_GM3.14 U6_GM4.3 U6_GM4.5 U6_GM4.11 U6_GM4.12 U6_GM4.14 U6_GM5.3 U6_GM5.5 U6_GM5.11 U6_GM5.12 U6_GM5.14 U6_GM6.3 U6_GM6.5 U6_GM6.11 U6_GM6.12 U6_GM6.14 U6_GM7.3 U6_GM7.5 U6_GM7.11 U6_GM7.12 U6_GM7.14 U6_GM8.3 U6_GM8.5 U6_GM8.11 U6_GM8.12 U6_GM8.14 U6_GM9.3 U6_GM9.5 U6_GM9.11 U6_GM9.12 U6_GM9.14 U8_GM1.1 U8_GM1.8 U8_GM2.1 U8_GM2.8 U8_GM3.1 U8_GM3.8 U8_GM4.1 U8_GM4.8 U8_GM5.1 U8_GM5.8 U8_GM6.1 U8_GM6.8 U8_GM7.1 U8_GM7.8 U8_GM8.1 U8_GM8.8 U8_GM9.1 U8_GM9.8 U14.2 U14.7 U14.8 U16.1 U16.8 U20_GM1.1 U20_GM1.8 U20_GM2.1 U20_GM2.8 U20_GM3.1 U20_GM3.8 U20_GM4.1 U20_GM4.8 U20_GM5.1 U20_GM5.8 U20_GM6.1 U20_GM6.8 U20_GM7.1 U20_GM7.8 U20_GM8.1 U20_GM8.8 U20_GM9.1 U20_GM9.8 U21.3 U21.5 U21.11 U21.12 U21.14 U22.1 U22.6 U22.7 U22.8 U22.9 U22.29 U22.39 U22.40 U22.41 U22.42 U22.43 U22.44 U22.47 U22.48 U22.56 U22.57 U22.58 U22.59 U22.60 U22.61 U22.63 U22.64 U22.66 U22.67 U22.87 U22.88 U74.3 U74.6 U75.1 U75.4 U75.5 Ur4.3 Ur4.6

## Polygon pours and split planes (outlines as drawn)
V_IN on Top Layer "Top Layer-No Net 2" (solid, pour order 236): 1774,3502 cw(c1791,3502) 1791,3519 1815,3519 cw(c1814,3504) 1829,3503 1829,3419 1774,3419
OUT_LOW10 on Top Layer "Top Layer-No Net" (solid, pour order 203): 12929,2931 12919,2941 12881,2941 12876,2936 12876,2880 12899,2857 12899,2746 12919,2746 12929,2756
REFB11_5V on Top Layer "Top Layer-No Net" (solid, pour order 202): 13148,2688.02 13148,2645 13132,2629 13132,2612.54 13139.54,2605 13182,2605 13186,2609 13186,2630 13170,2646 13170,2688.02
REFB11_5V on Top Layer "Top Layer-No Net" (solid, pour order 201): 12870,2682 12870,2642 ccw(c12882,2642) 12882,2630 12886,2630 cw(c12886,2625) 12891,2625 12891,2600 cw(c12882,2600) 12882,2591 12857,2591 cw(c12857,2600) 12848,2600 12848,2682
GND on Top Layer "Top Layer-No Net" (solid, pour order 198): 12898,2356 12898,2395 12873,2420 12873,2431 12877,2435 12941.34,2435 12946.34,2430 12946.34,2420 12920,2393.66 12920,2356
+5V on Top Layer "Top Layer-No Net" (solid, pour order 197): 13098,2366 13100,2368 13169,2368 13172,2365 13172,2241 13168,2237 13104,2237 13098,2243
+5V on Top Layer "Top Layer-No Net" (solid, pour order 196): 12835,2367 12840,2372 12866,2372 12870,2368 12870,2236 12863.55,2229.55 12839.45,2229.55 12835,2234
GND on Top Layer "Top Layer-No Net" (solid, pour order 195): 2112.03,2349 2117.03,2354 2143.03,2354 2147.03,2350 2147.03,2218 2140.59,2211.55 2116.48,2211.55 2112.03,2216
GND on Top Layer "Top Layer-No Net" (solid, pour order 194): 2037,2349 2031,2355 1969,2355 1962,2348 1962,2278 1972,2268 2028,2268 2037,2277
REFC1_5V on Top Layer "Top Layer-No Net" (solid, pour order 193): 1986,2689.19 1986,2649.19 ccw(c1998,2649.19) 1998,2637.19 2002,2637.19 cw(c2002,2632.19) 2007,2632.19 2007,2607.19 cw(c1998,2607.19) 1998,2598.19 1973,2598.19 cw(c1973,2607.19) 1964,2607.19 1964,2689.19
REFA1 on Top Layer "Top Layer-No Net" (solid, pour order 192): 2336,3664 2336,3680 cw(c2343,3680) 2343,3687 2402.17,3687 cw(c2402.17,3680) 2409.17,3680 ccw(c2427.17,3680) 2427.17,3662 2431,3662 cw(c2431,3660) 2433,3660 2433,3642 2342,3642 cw(c2342,3648) 2336,3648 2336,3664
REFC1 on Top Layer "Top Layer-No Net" (solid, pour order 191): 2114,2915.34 cw(c2157.84,2892.09) 2126.42,2930.5 2270.5,2930.5 cw(c2270.5,2903) 2298,2903 2298,2829.53 cw(c2272.84,2829.53) 2272.84,2804.38 2156.11,2804.38 ccw(c2162.24,2772.43) 2130.3,2766.3 ccw(c2170.6,2766.3) 2170.6,2726 2227.81,2726 cw(c2227.81,2715) 2238.81,2715 cw(c2227.82,2714.99) 2227.81,2704 2162,2704 ccw(c2160,2680) 2136,2682 2114,2682
REFC_GM9 on Top Layer "Top Layer-No Net" (solid, pour order 190): 12082,2910.5 cw(c12102,2910.5) 12102,2930.5 12260.5,2930.5 cw(c12260.5,2903) 12288,2903 12288,2829.53 cw(c12262.84,2829.53) 12262.84,2804.38 12146.11,2804.38 ccw(c12146.11,2772.43) 12114.17,2772.43 ccw(c12160.6,2772.43) 12160.6,2726 12217.81,2726 cw(c12217.81,2715) 12228.81,2715 cw(c12217.81,2715) 12217.81,2704 12126,2704 ccw(c12126,2682) 12104,2682 12082,2682
REFC_GM8 on Top Layer "Top Layer-No Net" (solid, pour order 189): 10974,2910.5 cw(c10994,2910.5) 10994,2930.5 11152.5,2930.5 cw(c11152.5,2903) 11180,2903 11180,2829.53 cw(c11154.84,2829.53) 11154.84,2804.38 11038.11,2804.38 ccw(c11038.11,2772.43) 11006.17,2772.43 ccw(c11052.6,2772.43) 11052.6,2726 11109.81,2726 cw(c11109.81,2715) 11120.81,2715 cw(c11109.81,2715) 11109.81,2704 11018,2704 ccw(c11018,2682) 10996,2682 10974,2682
REFC_GM7 on Top Layer "Top Layer-No Net" (solid, pour order 188): 9866,2910.5 cw(c9886,2910.5) 9886,2930.5 10044.5,2930.5 cw(c10044.5,2903) 10072,2903 10072,2829.53 cw(c10046.84,2829.53) 10046.84,2804.38 9930.11,2804.38 ccw(c9930.11,2772.43) 9898.17,2772.43 ccw(c9944.6,2772.43) 9944.6,2726 10001.81,2726 cw(c10001.81,2715) 10012.81,2715 cw(c10001.81,2715) 10001.81,2704 9910,2704 ccw(c9910,2682) 9888,2682 9866,2682
REFC_GM6 on Top Layer "Top Layer-No Net" (solid, pour order 187): 8758,2910.5 cw(c8778,2910.5) 8778,2930.5 8936.5,2930.5 cw(c8936.5,2903) 8964,2903 8964,2829.53 cw(c8938.84,2829.53) 8938.84,2804.38 8822.11,2804.38 ccw(c8822.11,2772.43) 8790.17,2772.43 ccw(c8836.6,2772.43) 8836.6,2726 8893.81,2726 cw(c8893.81,2715) 8904.81,2715 cw(c8893.81,2715) 8893.81,2704 8802,2704 ccw(c8802,2682) 8780,2682 8758,2682
REFC_GM5 on Top Layer "Top Layer-No Net" (solid, pour order 186): 7650,2910.5 cw(c7670,2910.5) 7670,2930.5 7828.5,2930.5 cw(c7828.5,2903) 7856,2903 7856,2829.53 cw(c7830.84,2829.53) 7830.84,2804.38 7714.11,2804.38 ccw(c7714.11,2772.43) 7682.17,2772.43 ccw(c7728.6,2772.43) 7728.6,2726 7785.81,2726 cw(c7785.81,2715) 7796.81,2715 cw(c7785.81,2715) 7785.81,2704 7694,2704 ccw(c7694,2682) 7672,2682 7650,2682
REFC_GM4 on Top Layer "Top Layer-No Net" (solid, pour order 185): 6542,2910.5 cw(c6562,2910.5) 6562,2930.5 6720.5,2930.5 cw(c6720.5,2903) 6748,2903 6748,2829.53 cw(c6722.84,2829.53) 6722.84,2804.38 6606.11,2804.38 ccw(c6606.11,2772.43) 6574.17,2772.43 ccw(c6620.6,2772.43) 6620.6,2726 6677.81,2726 cw(c6677.81,2715) 6688.81,2715 cw(c6677.81,2715) 6677.81,2704 6586,2704 ccw(c6586,2682) 6564,2682 6542,2682
REFC_GM3 on Top Layer "Top Layer-No Net" (solid, pour order 184): 5434,2910.5 cw(c5454,2910.5) 5454,2930.5 5612.5,2930.5 cw(c5612.5,2903) 5640,2903 5640,2829.53 cw(c5614.84,2829.53) 5614.84,2804.38 5498.11,2804.38 ccw(c5498.11,2772.43) 5466.17,2772.43 ccw(c5512.6,2772.43) 5512.6,2726 5569.81,2726 cw(c5569.81,2715) 5580.81,2715 cw(c5569.81,2715) 5569.81,2704 5478,2704 ccw(c5478,2682) 5456,2682 5434,2682
REFC_GM2 on Top Layer "Top Layer-No Net" (solid, pour order 183): 4326,2910.5 cw(c4346,2910.5) 4346,2930.5 4504.5,2930.5 cw(c4504.5,2903) 4532,2903 4532,2829.53 cw(c4506.84,2829.53) 4506.84,2804.38 4390.11,2804.38 ccw(c4390.11,2772.43) 4358.17,2772.43 ccw(c4404.6,2772.43) 4404.6,2726 4461.81,2726 cw(c4461.81,2715) 4472.81,2715 cw(c4461.81,2715) 4461.81,2704 4370,2704 ccw(c4370,2682) 4348,2682 4326,2682
REFC_GM1 on Top Layer "Top Layer-No Net" (solid, pour order 182): 3209,2910.5 cw(c3229,2910.5) 3229,2930.5 3387.5,2930.5 cw(c3387.5,2903) 3415,2903 3415,2829.53 cw(c3389.84,2829.53) 3389.84,2804.38 3273.11,2804.38 ccw(c3273.11,2772.43) 3241.17,2772.43 ccw(c3287.6,2772.43) 3287.6,2726 3344.81,2726 cw(c3344.81,2715) 3355.81,2715 cw(c3344.81,2715) 3344.81,2704 3253,2704 ccw(c3253,2682) 3231,2682 3209,2682
REFC_5V_GM3 on Top Layer "Top Layer-No Net" (solid, pour order 113): 18 vertices, not listed, extent 5264,2594 5425,2911.7
REFA_GM2 on Top Layer "Top Layer-No Net" (solid, pour order 92): 4570,3664 4570,3680 cw(c4577,3680) 4577,3687 4636.17,3687 cw(c4636.17,3680) 4643.17,3680 ccw(c4661.17,3680) 4661.17,3662 4665,3662 cw(c4665,3660) 4667,3660 4667,3642 4576,3642 cw(c4576,3648) 4570,3648 4570,3664
REFB_5V_GM2 on Top Layer "Top Layer-No Net" (solid, pour order 101): 4080,2998 4123,2998 ccw(c4123,3013) 4138,3013 cw(c4149,3013) 4149,3024 4184,3024 cw(c4184,3022) 4186,3022 4186,2902 4159,2902 cw(c4159,2922) 4139,2922 ccw(c4130.5,2922) 4130.5,2930.5 4078.5,2930.5 cw(c4078.5,2939) 4070,2939 4070,2988 cw(c4080,2988)
REFC_5V_GM2 on Top Layer "Top Layer-No Net" (solid, pour order 119): 3998,2682 3998,2642 ccw(c4010,2642) 4010,2630 4014,2630 cw(c4014,2625) 4019,2625 4019,2600 cw(c4010,2600) 4010,2591 3985,2591 cw(c3985,2600) 3976,2600 3976,2682
REFA_GM2 on Top Layer "Top Layer-No Net" (solid, pour order 128): 4752,2879 4781,2908 4781,2838 4801.5,2817.5 4781,2797 4781,2740 4796,2725 4847,2725 4857,2715 4857,2704.07 4771.93,2704.07 4771.92,2704.07 cw(c4771.92,2724) 4752,2724
+5V on Top Layer "Top Layer-No Net" (solid, pour order 137): 3963,2367 3968,2372 3994,2372 3998,2368 3998,2236 3991.55,2229.55 3967.45,2229.55 3963,2234
+5V on Top Layer "Top Layer-No Net" (solid, pour order 146): 4226,2366 4228,2368 4297,2368 4300,2365 4300,2241 4296,2237 4232,2237 4226,2243
GND on Top Layer "Top Layer-No Net" (solid, pour order 155): 4026,2356 4026,2395 4001,2420 4001,2431 4005,2435 4069.34,2435 4074.34,2430 4074.34,2420 4048,2393.66 4048,2356
REFA_GM3 on Top Layer "Top Layer-No Net" (solid, pour order 93): 5678,3664 5678,3680 cw(c5685,3680) 5685,3687 5744.17,3687 cw(c5744.17,3680) 5751.17,3680 ccw(c5769.17,3680) 5769.17,3662 5773,3662 cw(c5773,3660) 5775,3660 5775,3642 5684,3642 cw(c5684,3648) 5678,3648 5678,3664
REFB_5V_GM3 on Top Layer "Top Layer-No Net" (solid, pour order 102): 5188,2998 5231,2998 ccw(c5231,3013) 5246,3013 cw(c5257,3013) 5257,3024 5292,3024 cw(c5292,3022) 5294,3022 5294,2902 5267,2902 cw(c5267,2922) 5247,2922 ccw(c5238.5,2922) 5238.5,2930.5 5186.5,2930.5 cw(c5186.5,2939) 5178,2939 5178,2988 cw(c5188,2988)
REFC_5V_GM3 on Top Layer "Top Layer-No Net" (solid, pour order 120): 5106,2682 5106,2642 ccw(c5118,2642) 5118,2630 5122,2630 cw(c5122,2625) 5127,2625 5127,2600 cw(c5118,2600) 5118,2591 5093,2591 cw(c5093,2600) 5084,2600 5084,2682
REFA_GM3 on Top Layer "Top Layer-No Net" (solid, pour order 129): 5860,2879 5889,2908 5889,2838 5909.5,2817.5 5889,2797 5889,2740 5904,2725 5955,2725 5965,2715 5965,2704.07 5879.93,2704.07 5879.92,2704.07 cw(c5879.92,2724) 5860,2724
+5V on Top Layer "Top Layer-No Net" (solid, pour order 138): 5071,2367 5076,2372 5102,2372 5106,2368 5106,2236 5099.55,2229.55 5075.45,2229.55 5071,2234
+5V on Top Layer "Top Layer-No Net" (solid, pour order 147): 5334,2366 5336,2368 5405,2368 5408,2365 5408,2241 5404,2237 5340,2237 5334,2243
GND on Top Layer "Top Layer-No Net" (solid, pour order 156): 5134,2356 5134,2395 5109,2420 5109,2431 5113,2435 5177.34,2435 5182.34,2430 5182.34,2420 5156,2393.66 5156,2356
REFA_GM8 on Top Layer "Top Layer-No Net" (solid, pour order 94): 11218,3664 11218,3680 cw(c11225,3680) 11225,3687 11284.17,3687 cw(c11284.17,3680) 11291.17,3680 ccw(c11309.17,3680) 11309.17,3662 11313,3662 cw(c11313,3660) 11315,3660 11315,3642 11224,3642 cw(c11224,3648) 11218,3648 11218,3664
REFB_5V_GM8 on Top Layer "Top Layer-No Net" (solid, pour order 103): 10728,2998 10771,2998 ccw(c10771,3013) 10786,3013 cw(c10797,3013) 10797,3024 10832,3024 cw(c10832,3022) 10834,3022 10834,2902 10807,2902 cw(c10807,2922) 10787,2922 ccw(c10778.5,2922) 10778.5,2930.5 10726.5,2930.5 cw(c10726.5,2939) 10718,2939 10718,2988 cw(c10728,2988)
REFC_5V_GM8 on Top Layer "Top Layer-No Net" (solid, pour order 121): 10646,2682 10646,2642 ccw(c10658,2642) 10658,2630 10662,2630 cw(c10662,2625) 10667,2625 10667,2600 cw(c10658,2600) 10658,2591 10633,2591 cw(c10633,2600) 10624,2600 10624,2682
REFA_GM8 on Top Layer "Top Layer-No Net" (solid, pour order 130): 11400,2879 11429,2908 11429,2838 11449.5,2817.5 11429,2797 11429,2740 11444,2725 11495,2725 11505,2715 11505,2704.07 11419.93,2704.07 11419.92,2704.07 cw(c11419.92,2724) 11400,2724
+5V on Top Layer "Top Layer-No Net" (solid, pour order 139): 10611,2367 10616,2372 10642,2372 10646,2368 10646,2236 10639.55,2229.55 10615.45,2229.55 10611,2234
+5V on Top Layer "Top Layer-No Net" (solid, pour order 148): 10874,2366 10876,2368 10945,2368 10948,2365 10948,2241 10944,2237 10880,2237 10874,2243
GND on Top Layer "Top Layer-No Net" (solid, pour order 157): 10674,2356 10674,2395 10649,2420 10649,2431 10653,2435 10717.34,2435 10722.34,2430 10722.34,2420 10696,2393.66 10696,2356
REFA_GM9 on Top Layer "Top Layer-No Net" (solid, pour order 95): 12326,3664 12326,3680 cw(c12333,3680) 12333,3687 12392.17,3687 cw(c12392.17,3680) 12399.17,3680 ccw(c12417.17,3680) 12417.17,3662 12421,3662 cw(c12421,3660) 12423,3660 12423,3642 12332,3642 cw(c12332,3648) 12326,3648 12326,3664
REFB_5V_GM9 on Top Layer "Top Layer-No Net" (solid, pour order 104): 11836,2998 11879,2998 ccw(c11879,3013) 11894,3013 cw(c11905,3013) 11905,3024 11940,3024 cw(c11940,3022) 11942,3022 11942,2902 11915,2902 cw(c11915,2922) 11895,2922 ccw(c11886.5,2922) 11886.5,2930.5 11834.5,2930.5 cw(c11834.5,2939) 11826,2939 11826,2988 cw(c11836,2988)
REFC_5V_GM9 on Top Layer "Top Layer-No Net" (solid, pour order 122): 11754,2682 11754,2642 ccw(c11766,2642) 11766,2630 11770,2630 cw(c11770,2625) 11775,2625 11775,2600 cw(c11766,2600) 11766,2591 11741,2591 cw(c11741,2600) 11732,2600 11732,2682
REFA_GM9 on Top Layer "Top Layer-No Net" (solid, pour order 131): 12508,2879 12537,2908 12537,2838 12557.5,2817.5 12537,2797 12537,2740 12552,2725 12603,2725 12613,2715 12613,2704.07 12527.93,2704.07 12527.92,2704.07 cw(c12527.92,2724) 12508,2724
+5V on Top Layer "Top Layer-No Net" (solid, pour order 140): 11719,2367 11724,2372 11750,2372 11754,2368 11754,2236 11747.55,2229.55 11723.45,2229.55 11719,2234
+5V on Top Layer "Top Layer-No Net" (solid, pour order 149): 11982,2366 11984,2368 12053,2368 12056,2365 12056,2241 12052,2237 11988,2237 11982,2243
GND on Top Layer "Top Layer-No Net" (solid, pour order 158): 11782,2356 11782,2395 11757,2420 11757,2431 11761,2435 11825.34,2435 11830.34,2430 11830.34,2420 11804,2393.66 11804,2356
REFA_GM7 on Top Layer "Top Layer-No Net" (solid, pour order 96): 10110,3664 10110,3680 cw(c10117,3680) 10117,3687 10176.17,3687 cw(c10176.17,3680) 10183.17,3680 ccw(c10201.17,3680) 10201.17,3662 10205,3662 cw(c10205,3660) 10207,3660 10207,3642 10116,3642 cw(c10116,3648) 10110,3648 10110,3664
REFB_5V_GM7 on Top Layer "Top Layer-No Net" (solid, pour order 105): 9620,2998 9663,2998 ccw(c9663,3013) 9678,3013 cw(c9689,3013) 9689,3024 9724,3024 cw(c9724,3022) 9726,3022 9726,2902 9699,2902 cw(c9699,2922) 9679,2922 ccw(c9670.5,2922) 9670.5,2930.5 9618.5,2930.5 cw(c9618.5,2939) 9610,2939 9610,2988 cw(c9620,2988)
REFC_5V_GM7 on Top Layer "Top Layer-No Net" (solid, pour order 123): 9538,2682 9538,2642 ccw(c9550,2642) 9550,2630 9554,2630 cw(c9554,2625) 9559,2625 9559,2600 cw(c9550,2600) 9550,2591 9525,2591 cw(c9525,2600) 9516,2600 9516,2682
REFA_GM7 on Top Layer "Top Layer-No Net" (solid, pour order 132): 10292,2879 10321,2908 10321,2838 10341.5,2817.5 10321,2797 10321,2740 10336,2725 10387,2725 10397,2715 10397,2704.07 10311.93,2704.07 10311.92,2704.07 cw(c10311.92,2724) 10292,2724
+5V on Top Layer "Top Layer-No Net" (solid, pour order 141): 9503,2367 9508,2372 9534,2372 9538,2368 9538,2236 9531.55,2229.55 9507.45,2229.55 9503,2234
+5V on Top Layer "Top Layer-No Net" (solid, pour order 150): 9766,2366 9768,2368 9837,2368 9840,2365 9840,2241 9836,2237 9772,2237 9766,2243
GND on Top Layer "Top Layer-No Net" (solid, pour order 159): 9566,2356 9566,2395 9541,2420 9541,2431 9545,2435 9609.34,2435 9614.34,2430 9614.34,2420 9588,2393.66 9588,2356
REFA_GM6 on Top Layer "Top Layer-No Net" (solid, pour order 97): 9002,3664 9002,3680 cw(c9009,3680) 9009,3687 9068.17,3687 cw(c9068.17,3680) 9075.17,3680 ccw(c9093.17,3680) 9093.17,3662 9097,3662 cw(c9097,3660) 9099,3660 9099,3642 9008,3642 cw(c9008,3648) 9002,3648 9002,3664
REFB_5V_GM6 on Top Layer "Top Layer-No Net" (solid, pour order 106): 8512,2998 8555,2998 ccw(c8555,3013) 8570,3013 cw(c8581,3013) 8581,3024 8616,3024 cw(c8616,3022) 8618,3022 8618,2902 8591,2902 cw(c8591,2922) 8571,2922 ccw(c8562.5,2922) 8562.5,2930.5 8510.5,2930.5 cw(c8510.5,2939) 8502,2939 8502,2988 cw(c8512,2988)
REFC_5V_GM6 on Top Layer "Top Layer-No Net" (solid, pour order 124): 8430,2682 8430,2642 ccw(c8442,2642) 8442,2630 8446,2630 cw(c8446,2625) 8451,2625 8451,2600 cw(c8442,2600) 8442,2591 8417,2591 cw(c8417,2600) 8408,2600 8408,2682
REFA_GM6 on Top Layer "Top Layer-No Net" (solid, pour order 133): 9184,2879 9213,2908 9213,2838 9233.5,2817.5 9213,2797 9213,2740 9228,2725 9279,2725 9289,2715 9289,2704.07 9203.93,2704.07 9203.92,2704.07 cw(c9203.92,2724) 9184,2724
+5V on Top Layer "Top Layer-No Net" (solid, pour order 142): 8395,2367 8400,2372 8426,2372 8430,2368 8430,2236 8423.55,2229.55 8399.45,2229.55 8395,2234
+5V on Top Layer "Top Layer-No Net" (solid, pour order 151): 8658,2366 8660,2368 8729,2368 8732,2365 8732,2241 8728,2237 8664,2237 8658,2243